# EAGLE board TSSOP28_Adapter (EAGLE 5.00)
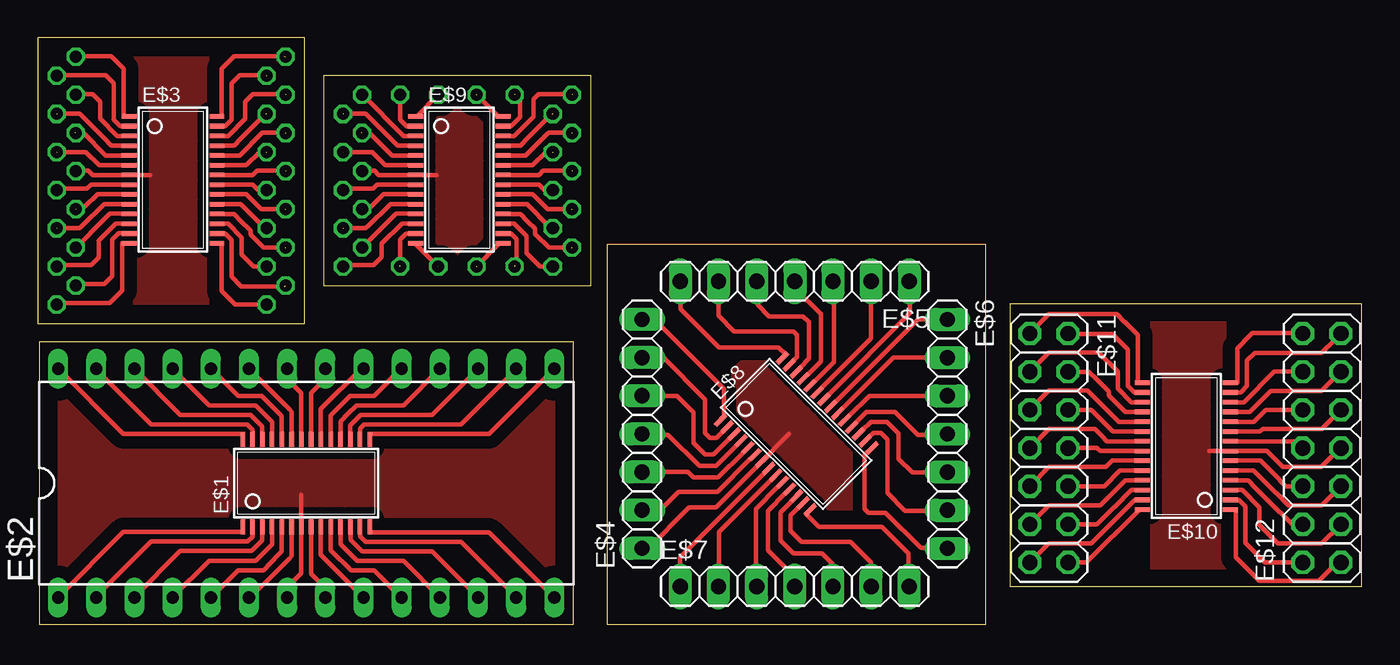
[diagram p0: board, top side]

Size 88.14 x 39.07 mm. Coordinates in mm from the lower left corner, seen from the top.
Outline: 35.66,18.8 0.1,18.8 0.1,0 35.66,0 35.66,18.8
Outline: 0,39.06 0,20.01 17.78,20.01 17.78,39.06 0,39.06
Outline: 37.9,25.3 37.9,0 63.12,0 63.12,25.3 37.9,25.3
Outline: 19.05,36.52 19.05,22.55 36.83,22.55 36.83,36.52 19.05,36.52
Outline: 88.14,2.51 88.14,21.31 64.72,21.31 64.72,2.51 88.14,2.51
Copper layers (1*16): Top 0.035mm / dielectric 1.5mm / Bottom 0.035mm
Design rules "default": minimum track width 10mil, minimum drill 24mil, track to track 8mil, track to pad 8mil, pad to pad 8mil, via to via 8mil, smd to smd 8mil, copper to edge 40mil, drill to drill 8mil, minimum pad ring 10mil, minimum via ring 8mil, stop-mask expansion 4mil, vias tented up to drill 0mil, thermal gap 10mil

## Footprints (pad centres in the part's own frame; a part is rotated, then mirrored left to right if it is on the bottom)
TSSOP28 = smd 0.305 x 0.991: 1 -4.225,-2.918; 2 -3.575,-2.918; 3 -2.925,-2.918; 4 -2.275,-2.918; 5 -1.625,-2.918; 6 -0.975,-2.918; 7 -0.325,-2.918; 8 0.325,-2.918; 9 0.975,-2.918; 10 1.625,-2.918; 11 2.275,-2.918; 12 2.925,-2.918; 13 3.575,-2.918; 14 4.225,-2.918; 15 4.225,2.918; 16 3.575,2.918; 17 2.925,2.918; 18 2.275,2.918; 19 1.625,2.918; 20 0.975,2.918; 21 0.325,2.918; 22 -0.325,2.918; 23 -0.975,2.918; 24 -1.625,2.918; 25 -2.275,2.918; 26 -2.925,2.918; 27 -3.575,2.918; 28 -4.225,2.918
DIL28 = drill 0.813 long: 1 -16.51,-7.62; 2 -13.97,-7.62; 3 -11.43,-7.62; 4 -8.89,-7.62; 5 -6.35,-7.62; 6 -3.81,-7.62; 7 -1.27,-7.62; 8 1.27,-7.62; 9 3.81,-7.62; 10 6.35,-7.62; 11 8.89,-7.62; 12 11.43,-7.62; 13 13.97,-7.62; 14 16.51,-7.62; 15 16.51,7.62; 16 13.97,7.62; 17 11.43,7.62; 18 8.89,7.62; 19 6.35,7.62; 20 3.81,7.62; 21 1.27,7.62; 22 -1.27,7.62; 23 -3.81,7.62; 24 -6.35,7.62; 25 -8.89,7.62; 26 -11.43,7.62; 27 -13.97,7.62; 28 -16.51,7.62
1X07 = drill 1.016 long: 1 -7.62,0; 2 -5.08,0; 3 -2.54,0; 4 0,0; 5 2.54,0; 6 5.08,0; 7 7.62,0
2X07 = drill 1.016 octagon: 1 -7.62,-1.27; 2 -7.62,1.27; 3 -5.08,-1.27; 4 -5.08,1.27; 5 -2.54,-1.27; 6 -2.54,1.27; 7 0,-1.27; 8 0,1.27; 9 2.54,-1.27; 10 2.54,1.27; 11 5.08,-1.27; 12 5.08,1.27; 13 7.62,-1.27; 14 7.62,1.27

## Placement (x,y rotation side)
E$1  [TSSOP28]  17.88,9.4 0 top
E$2  [DIL28]  17.88,9.4 0 top
E$3  [TSSOP28]  9.02,29.59 270 top
E$4  [1X07]  40.23,12.67 90 top
E$5  [1X07]  50.39,22.83 180 top
E$6  [1X07]  60.55,12.67 270 top
E$7  [1X07]  50.39,2.51 0 top
E$8  [TSSOP28]  50.5,12.67 315 top
E$9  [TSSOP28]  28.07,29.59 270 top
E$10  [TSSOP28]  76.45,11.86 90 top
E$11  [2X07]  67.31,11.73 270 top
E$12  [2X07]  85.47,11.73 90 top

## Library data of the parts
E$1 E$3 E$8-E$10 = ref-packages
E$2 = micro-motorola
E$4-E$7 E$11 E$12 = pinhead

## Nets
S$69: E$6.3
S$70: E$6.2
S$189: E$11.13
S$224: E$11.12
S$225: E$11.14

## Tracks (layer width: path | path; a pad name or v marks a point on that pad's centre or on a via)
GNDMC
  Top 0.305: 17.55,5.84 17.55,3.4 16.61,2.46 16.61,1.8 | 17.55,5.84 17.55,6.1 | 17.55,5.84 17.55,8.61
  pour Top (isolate 0.813): 34.42,3.53 1.37,3.53 1.37,15.14 34.42,15.14
S$1  (via drill 0.8)  (1 unrouted)
  Top 0.305: 25.2,25.35 25.2,25.27 26.64,23.82
  other vias: 26.67,23.83
S$2
  Top 0.305: 16.92,6.07 16.92,4.55 16.76,4.39 15.93,3.53 14.1,1.73
S$3
  Top 0.305: 16.26,6.15 16.26,4.85 16.05,4.65 15.52,4.09 15.04,3.61 13.36,3.61 11.56,1.8
S$4
  Top 0.305: 15.6,6.12 15.6,5.31 14.53,4.24 11.4,4.24 8.97,1.8
S$5
  Top 0.305: 14.93,6.1 14.93,5.59 14.25,4.88 9.5,4.88 6.43,1.8
S$6
  Top 0.305: 14.3,6.1 14.3,5.82 13.97,5.51 7.57,5.51 3.91,1.85
S$7
  Top 0.305: 13.66,6.15 5.71,6.15 1.4,1.83
S$8
  Top 0.305: 18.21,12.73 18.21,15.42 19.15,16.36 19.15,16.94
S$9
  Top 0.305: 18.85,12.75 18.85,14.33 21.54,16.99 21.67,16.99
S$10
  Top 0.305: 19.51,12.67 19.51,13.92 20.8,15.21 22.4,15.21 24.21,17.02
S$11
  Top 0.305: 20.17,12.7 20.17,13.51 20.65,14.02 21.23,14.58 24.36,14.58 26.8,17.02
S$12
  Top 0.305: 20.8,12.73 20.8,13.23 21.51,13.94 26.26,13.94 29.34,17.02
S$13
  Top 0.305: 21.46,12.8 21.46,13.03 21.74,13.31 28.19,13.31 31.85,16.97
S$14
  Top 0.305: 22.1,12.67 30.05,12.67 34.37,16.99
S$15
  Top 0.305: 18.21,6.07 18.21,3.38 19.15,2.44
S$16
  Top 0.305: 18.85,6.04 18.85,4.62 21.67,1.8
S$17
  Top 0.305: 24.21,1.78 22.4,3.58 20.85,3.58 19.51,4.93 19.51,6.12
S$18
  Top 0.305: 26.8,1.78 24.36,4.22 21.26,4.22 20.17,5.31 20.17,6.1
S$19
  Top 0.305: 20.83,6.07 20.83,5.61 21.59,4.85 26.26,4.85 29.34,1.78
S$20
  Top 0.305: 21.46,6.07 21.46,5.84 21.82,5.49 28.19,5.49 31.85,1.83
S$21
  Top 0.305: 22.1,6.12 30.05,6.12 34.37,1.8
S$22
  Top 0.305: 17.55,12.73 17.55,15.42 16.61,16.36
S$23
  Top 0.305: 16.92,12.75 16.92,14.15 16.76,14.3 15.87,15.21 14.1,16.99
S$24
  Top 0.305: 16.26,12.67 16.26,13.87 14.91,15.21 13.36,15.21 11.56,17.02
S$25
  Top 0.305: 15.6,12.7 15.6,13.46 15.11,13.97 14.5,14.58 11.4,14.58 8.97,17.02
S$26
  Top 0.305: 14.93,12.73 14.93,13.18 14.17,13.94 9.5,13.94 6.43,17.02
S$27
  Top 0.305: 14.3,12.73 14.3,12.95 13.94,13.31 7.57,13.31 3.91,16.97
S$28
  Top 0.305: 13.66,12.67 5.71,12.67 1.4,16.99
S$29
  Top 0.305: 19.13,1.83 19.13,2.41
S$30
  Top 0.305: 16.59,16.97 16.59,16.38
S$31  (via drill 0.8)
  other vias: 1.27,21.29
S$32  (via drill 0.8)
  other vias: 2.54,22.56
S$33  (via drill 0.8)
  other vias: 1.27,23.83
S$34  (via drill 0.8)
  other vias: 2.54,25.1
S$35  (via drill 0.8)  (1 unrouted)
  Top 0.305: 2.9,26.47 2.79,26.36 1.32,26.36
  other vias: 1.27,26.37
S$36  (via drill 0.8)  (1 unrouted)
  Top 0.305: 3.07,27.76 2.97,27.66 2.57,27.66
  other vias: 2.54,27.64
S$37  (via drill 0.8)
  other vias: 1.27,28.91
S$38
  Top 0.305: 4.42,32.36 2.79,33.98
S$39  (via drill 0.8)  (1 unrouted)
  Top 0.305: 13.56,32.36 15.19,33.98
  other vias: 15.24,33.99
S$40
  Top 0: 7.47,29.92 7.21,29.92 | 7.49,29.92 7.62,29.92
  Top 0.305: 5.64,29.92 5.66,29.92 | 2.51,30.2 3.38,30.2 3.66,29.92 5.64,29.92 | 5.64,29.92 7.47,29.92 7.49,29.92
  pour Top (isolate 0.813): 6.35,37.8 11.43,37.8 11.43,21.29 6.35,21.29
S$41  (via drill 0.8)  (1 unrouted)
  Top 0.305: 24.76,26.01 24.54,26.01 24.13,25.6 24.13,23.88
  other vias: 24.13,23.83
S$42  (via drill 0.8)  (1 unrouted)
  Top 0.305: 14.81,27.71 14.88,27.63 16.48,27.63
  other vias: 16.51,27.64
S$43
  Top 0.305: 5.64,30.56 4.09,30.56 3.2,31.44
S$44  (via drill 0.8)
  other vias: 1.27,36.53
S$45  (via drill 0.8)  (1 unrouted)
  Top 0.305: 1.32,33.98 2.74,33.98
  other vias: 1.27,33.99
S$46  (via drill 0.8)  (1 unrouted)
  Top 0.305: 1.3,31.44 3.17,31.44
  other vias: 1.27,31.45
S$47  (via drill 0.8)  (1 unrouted)
  Top 0.305: 15.24,22.5 16.46,22.5
  other vias: 16.51,22.56
S$48
  Top 0.305: 5.64,31.22 4.55,31.22 3.02,32.74
S$49
  Top 0.305: 45.69,13.92 45.69,15.67 41.07,20.29 40.31,20.29 40.28,20.32
S$50
  Top 0.305: 40.23,17.75 40.21,17.78
S$51
  Top 0.305: 45.62,12.85 45.19,12.42 44.75,12.42 44.42,12.75 44.42,14.99 41.58,17.83 40.49,17.83 40.39,17.73
S$52
  Top 0.305: 42.77,2.54 42.75,2.57 42.75,4.47 48.36,10.08
S$53
  Top 0.305: 46.08,12.39 44.98,11.33 44.42,11.33 43.66,12.09 43.66,14.1 42.57,15.21 40.33,15.21
S$54
  Top 0.305: 46.51,11.91 45.14,10.54 44.04,10.54 41.96,12.62 40.18,12.62
S$55
  Top 0.305: 46.96,11.46 45.29,9.78 43.64,9.78 43.28,10.13 40.31,10.13
S$56
  Top 0.305: 47.42,11 45.24,8.81 42.65,8.81 41.38,7.54 40.28,7.54
S$57
  Top 0.305: 47.85,10.49 45.14,7.77 43.36,7.77 40.59,5 40.28,5 | 47.85,10.49 47.93,10.57 | 47.85,10.49 47.93,10.59 50.01,12.67
  pour Top (isolate 0.61): 46.33,16.87 46.33,14.02 52.63,7.72 54.31,7.72 54.41,7.82 54.41,11.63 53.75,12.29 48.62,17.42 46.86,17.42 46.38,16.94
S$58
  Top 0.305: 47.85,2.59 47.88,2.62
S$59
  Top 0.305: 48.84,9.65 45.36,6.17 45.36,2.51
S$60
  Top 0.305: 49.28,9.17 47.8,7.67 47.8,2.57
S$61
  Top 0.305: 49.76,8.74 48.62,7.57 48.62,4.93 50.27,3.28 50.39,3.28 50.34,3.23 50.34,2.54
S$62
  Top 0.305: 50.19,8.23 49.43,7.47 49.43,5.59 50.29,4.72 52.2,4.72 52.93,3.99 52.93,2.62
S$63
  Top 0.305: 50.65,7.77 50.11,7.24 50.11,6.22 50.85,5.49 54.1,5.49 55.47,4.11 55.47,2.62
S$64
  Top 0.305: 51.13,7.34 51.99,6.5 56.18,6.5 57.96,4.72 57.96,2.64
S$65
  Top 0.305: 55.27,11.51 55.04,11.28 55.04,7.67 55.3,7.42 56.44,7.42 58.78,5.08 60.58,5.08
S$66
  Top 0.305: 55.37,12.5 55.63,12.75 56.13,12.75 56.57,12.32 56.57,8.74 57.73,7.57 60.63,7.57
S$67
  Top 0.305: 54.89,12.93 55.45,13.49 56.54,13.49 57.3,12.73 57.3,11.02 58.22,10.11 60.68,10.11
S$68
  Top 0.305: 54.41,13.39 55.17,14.15 57.05,14.15 58.57,12.62 59.66,12.62 59.72,12.67 60.58,12.67 60.55,12.7 60.55,12.73
S$69
  Top 0.305: 54,13.87 55.35,15.21 E$6.3
S$70
  Top 0.305: 53.54,14.35 56.95,17.75 E$6.2
S$71
  Top 0.305: 53.06,14.78 58.57,20.29 60.63,20.29
S$72
  Top 0.305: 52.6,15.24 58.06,20.73 58.06,22.86
S$73
  Top 0.305: 52.15,15.7 55.47,19.02 55.47,22.86
S$74
  Top 0.305: 51.69,16.18 52.98,17.47 52.98,22.78
S$75
  Top 0.305: 51.23,16.61 52.12,17.5 52.12,20.65 50.44,22.33 50.44,22.86
S$76
  Top 0.305: 50.75,17.07 51.33,17.7 51.33,20.12 50.95,20.5 48.69,20.5 47.93,21.26 47.93,22.81
S$77
  Top 0.305: 50.34,17.6 50.55,17.81 50.55,19.25 50.32,19.51 46.35,19.51 45.31,20.55 45.31,22.81
S$78
  Top 0.305: 49.76,17.98 49.3,18.44 45.36,18.44 42.8,21.01 42.8,22.86
S$79
  Top 0.305: 5.64,31.88 4.9,31.88 4.42,32.36
S$80
  Top 0.305: 5.69,32.51 5.31,32.51 4.17,33.65 4.17,34.8 3.68,35.28 2.54,35.28
S$81  (via drill 0.8)
  other vias: 2.54,37.8
S$82  (via drill 0.8)
  other vias: 2.54,35.26
S$83  (via drill 0.8)  (1 unrouted)
  Top 0.305: 2.97,32.74 2.51,32.74
  other vias: 2.54,32.72
S$84  (via drill 0.8)
  other vias: 2.54,30.18
S$85  (via drill 0.8)
  other vias: 15.24,21.29
S$86  (via drill 0.8)
  other vias: 15.24,23.83
S$87  (via drill 0.8)
  other vias: 15.24,26.37
S$88  (via drill 0.8)
  other vias: 15.24,28.91
S$89  (via drill 0.8)  (1 unrouted)
  Top 0.305: 12.32,29.92 14.33,29.92 14.6,30.2 16.51,30.2
  other vias: 16.51,30.18
S$90  (via drill 0.8)  (1 unrouted)
  Top 0.305: 12.34,30.56 13.89,30.56 14.78,31.44 15.21,31.44
  other vias: 15.24,31.45
S$91  (via drill 0.8)  (1 unrouted)
  Top 0.305: 12.34,31.22 13.44,31.22 14.96,32.74 16.48,32.74
  other vias: 16.51,32.72
S$92
  Top 0.305: 12.34,31.88 13.08,31.88 13.56,32.36
S$93  (via drill 0.8)  (1 unrouted)
  Top 0.305: 12.29,32.51 12.67,32.51 13.82,33.65 13.82,34.8 14.3,35.28 16.51,35.28
  other vias: 16.51,35.26
S$94  (via drill 0.8)  (1 unrouted)
  Top 0.305: 12.34,33.17 12.47,33.17 12.9,33.6 12.9,36.02 13.44,36.55 15.21,36.55
  other vias: 15.24,36.53
S$95  (via drill 0.8)  (1 unrouted)
  Top 0.305: 12.24,33.83 12.24,36.98 13.08,37.82 16.41,37.82
  other vias: 16.51,37.8
S$96
  Top 0.305: 2.69,25.22 4.32,26.85
S$97
  Top 0.305: 5.56,29.29 3.56,29.29 3.28,29.01 1.37,29.01
S$98
  Top 0.305: 5.54,28.65 3.99,28.65 3.1,27.76
S$99
  Top 0.305: 5.54,27.99 4.44,27.99 2.92,26.47
S$100
  Top 0.305: 5.54,27.33 4.8,27.33 4.32,26.85
S$101
  Top 0.305: 5.59,26.7 5.21,26.7 4.06,25.55 4.06,24.41 3.58,23.93 1.37,23.93
S$102
  Top 0.305: 5.54,26.03 5.41,26.03 4.98,25.6 4.98,23.19 4.44,22.66 2.72,22.66
S$103
  Top 0.305: 5.64,25.37 5.64,22.22 4.8,21.39 1.52,21.39
S$104
  Top 0.305: 14.15,26.24 13.56,26.82
S$105
  Top 0.305: 12.32,29.26 14.33,29.26 14.68,28.9 15.29,28.9
S$106
  Top 0.305: 12.34,28.63 13.89,28.63 14.78,27.74
S$107
  Top 0.305: 12.34,27.97 13.51,27.97 15.04,26.44
S$108
  Top 0.305: 12.34,27.3 13.08,27.3 13.56,26.82
S$109
  Top 0.305: 12.29,26.67 12.67,26.67 13.59,25.76 13.59,24.61 14.38,23.82 15.24,23.82
S$110
  Top 0.305: 12.34,26.01 12.47,26.01 12.9,25.58 12.9,23.16 13.56,22.5 15.29,22.5
S$111
  Top 0.305: 12.24,25.35 12.24,22.2 13.16,21.28 15.24,21.28
S$112
  Top 0.305: 5.64,33.17 5.51,33.17 5.08,33.6 5.08,36.02 4.55,36.55 1.32,36.55
S$113
  Top 0.305: 5.74,33.83 5.74,36.98 4.9,37.82 2.54,37.82
S$114  (via drill 0.8)  (1 unrouted)
  Top 0.305: 14.17,26.21 14.17,25.96 15.04,25.09 16.48,25.09 16.48,25.07
  other vias: 16.51,25.1
S$115  (via drill 0.8)
  other vias: 20.32,23.83
S$116  (via drill 0.8)
  other vias: 21.59,25.1
S$117  (via drill 0.8)  (1 unrouted)
  Top 0.305: 21.95,26.47 21.84,26.36 20.37,26.36
  other vias: 20.32,26.37
S$118  (via drill 0.8)  (1 unrouted)
  Top 0.305: 22.12,27.76 22.02,27.66 21.62,27.66
  other vias: 21.59,27.64
S$119  (via drill 0.8)
  other vias: 20.32,28.91
S$120  (via drill 0.8)  (1 unrouted)
  Top 0.305: 32.61,32.36 34.24,33.98
  other vias: 34.29,33.99
S$121  (via drill 0.8)  (1 unrouted)
  Top 0.305: 33.86,27.71 33.93,27.63 35.53,27.63
  other vias: 35.56,27.64
S$122
  Top 0.305: 82.5,12.19 83.74,12.19 84.18,11.76
S$123  (via drill 0.8)  (1 unrouted)
  Top 0.305: 20.37,33.98 21.79,33.98
  other vias: 20.32,33.99
S$124  (via drill 0.8)  (1 unrouted)
  Top 0.305: 20.35,31.44 22.22,31.44
  other vias: 20.32,31.45
S$126  (via drill 0.8)
  Top 0.305: 25.22,33.81 v26.67,35.25
S$127  (via drill 0.8)
  other vias: 21.59,35.26
S$128  (via drill 0.8)  (1 unrouted)
  Top 0.305: 22.02,32.74 21.56,32.74
  other vias: 21.59,32.72
S$129  (via drill 0.8)
  other vias: 21.59,30.18
S$130  (via drill 0.8)  (1 unrouted)
  Top 0.305: 30.66,25.35 30.66,25.27 29.24,23.85
  other vias: 29.21,23.83
S$131  (via drill 0.8)
  other vias: 34.29,23.83
S$132  (via drill 0.8)
  other vias: 34.29,26.37
S$133  (via drill 0.8)
  other vias: 34.29,28.91
S$134  (via drill 0.8)  (1 unrouted)
  Top 0.305: 31.37,29.92 33.38,29.92 33.65,30.2 35.56,30.2
  other vias: 35.56,30.18
S$135  (via drill 0.8)  (1 unrouted)
  Top 0.305: 31.39,30.56 32.94,30.56 33.83,31.44 34.26,31.44
  other vias: 34.29,31.45
S$136  (via drill 0.8)  (1 unrouted)
  Top 0.305: 31.39,31.22 32.49,31.22 34.01,32.74 35.53,32.74
  other vias: 35.56,32.72
S$137
  Top 0.305: 31.39,31.88 32.13,31.88 32.61,32.36
S$138  (via drill 0.8)  (1 unrouted)
  Top 0.305: 31.34,32.51 31.72,32.51 32.99,33.81 32.99,34.95 33.35,35.28 35.56,35.28
  other vias: 35.56,35.26
S$140  (via drill 0.8)  (1 unrouted)
  Top 0.305: 30.91,33.83 30.63,33.83 29.24,35.23
  other vias: 29.21,35.26
S$141
  Top 0.305: 21.74,25.22 23.37,26.85
S$142
  Top 0.305: 24.61,29.29 22.61,29.29 22.33,29.01 20.42,29.01
S$143
  Top 0.305: 24.59,28.65 23.04,28.65 22.15,27.76
S$144
  Top 0.305: 24.59,27.99 23.49,27.99 21.97,26.47
S$145
  Top 0.305: 24.59,27.33 23.85,27.33 23.37,26.85
S$146
  Top 0.305: 24.64,26.7 24.26,26.7 22.91,25.35 22.91,24.46 22.38,23.93 20.42,23.93
S$147  (via drill 0.8)  (1 unrouted)
  Top 0.305: 31.34,33.17 31.52,33.17 32.11,33.76 32.11,34.92 31.78,35.25
  other vias: 31.75,35.26
S$148  (via drill 0.8)
  Top 0.305: 24.69,33.15 24.59,33.15 24.13,33.6 v24.13,35.25
S$149
  Top 0.305: 32.61,26.82 33.1,26.34
S$150
  Top 0.305: 31.37,29.26 33.38,29.26 33.73,28.9 34.34,28.9
S$151
  Top 0.305: 31.39,28.63 32.94,28.63 33.83,27.74
S$152
  Top 0.305: 31.39,27.97 32.56,27.97 34.09,26.44
S$153
  Top 0.305: 31.39,27.3 32.13,27.3 32.61,26.82
S$154
  Top 0.305: 31.42,26.67 31.72,26.67 32.54,25.86 32.54,24.71 33.43,23.82 34.29,23.82
S$155  (via drill 0.8)  (1 unrouted)
  Top 0.305: 31.34,26.01 31.52,26.01 31.88,25.65 31.88,24 31.75,23.88
  other vias: 31.75,23.83
S$157
  Top 0.305: 23.47,32.36 21.84,33.98
S$158
  Top 0: 26.52,29.92 26.26,29.92 | 26.54,29.92 26.67,29.92
  Top 0.305: 24.69,29.92 24.71,29.92 | 21.56,30.2 22.43,30.2 22.71,29.92 24.69,29.92 | 24.69,29.92 26.52,29.92 26.54,29.92
  pour Top (isolate 0.813): 19.58,36.14 36.55,36.14 36.55,22.86 19.58,22.86
S$159
  Top 0.305: 24.69,30.56 23.14,30.56 22.25,31.44
S$160
  Top 0.305: 24.69,31.22 23.6,31.22 22.07,32.74
S$161
  Top 0.305: 24.69,31.88 23.95,31.88 23.47,32.36
S$162
  Top 0.305: 24.74,32.51 24.36,32.51 21.59,35.28
S$165  (via drill 0.8)  (1 unrouted)
  Top 0.305: 33.1,26.31 33.1,25.98 34.04,25.07 35.53,25.09 35.53,25.07
  other vias: 35.56,25.1
S$166
  Top 0.305: 81.74,14.27 84.18,14.27
S$167
  Top 0.305: 81.36,12.83 81.53,13 85.47,13 86.69,14.22 86.69,14.25
S$168
  Top 0.305: 82.09,11.25 82.85,10.49 85.45,10.49 86.66,11.71 86.72,11.71
S$170
  Top 0.305: 70.59,13.82 70.66,13.74
S$171
  Top 0.305: 82.24,10.03 83.08,9.19 84.23,9.19
S$173
  Top 0.305: 82.42,8.74 83.24,7.92 85.47,7.92 86.72,9.17 86.74,9.17
S$175
  Top 0.305: 82.7,7.44 83.49,6.65 84.15,6.65
S$176
  Top 0.305: 81.76,6.17 82.55,5.38 85.47,5.38 86.72,6.63 86.72,6.68
S$177
  Top 0.305: 80.92,4.88 81.66,4.14 84.15,4.14
S$178
  Top 0.305: 81.13,14.6 82.07,15.54 85.45,15.54 86.69,16.79
S$183
  Top 0.305: 71.15,11.53 73.15,11.53
S$184
  Top 0.305: 71.53,10.9 73.13,10.9
S$185
  Top 0.305: 73.13,10.24 72.03,10.24 70.99,9.19 68.61,9.19
S$186
  Top 0.305: 73.13,9.58 72.39,9.58 70.74,7.92 67.31,7.92 66.07,6.68
S$187
  Top 0.305: 73.18,8.94 72.8,8.94 71.65,7.8
S$188
  Top 0.305: 73.13,8.28 73.02,8.28 72.59,7.85
S$189
  Top 0.305: 72.59,7.85 70.13,5.38 67.31,5.38 E$11.13
S$190
  Top 0.305: 82.32,16.84 84.2,16.84
S$191
  Top 0.305: 79.83,12.19 82.52,12.19
S$192
  Top 0.305: 79.81,12.83 81.36,12.83
S$193
  Top 0.305: 79.86,13.49 80.95,13.49 81.74,14.27
S$194
  Top 0.305: 79.81,14.15 80.67,14.15 81.13,14.6
S$195
  Top 0.305: 79.88,14.78 80.26,14.78 82.32,16.84
S$196
  Top 0.305: 79.88,15.44 80.06,15.44 80.49,15.87 80.49,17.55 81,18.06 | 81,18.06 81.03,18.06 | 81,18.06 85.45,18.06 86.28,18.9 86.77,19.33
S$197
  Top 0.305: 79.83,16.08 79.83,18.36 80.72,19.25
S$198
  Top 0.305: 71.32,15.21 71.91,14.63
S$199
  Top 0.305: 73.15,12.19 71.17,12.19 70.81,12.55
S$200
  Top 0.305: 73.13,12.83 71.58,12.83 70.69,13.72
S$201
  Top 0.305: 73.13,13.49 71.96,13.49 70.43,15.01
S$202
  Top 0.305: 73.13,14.15 72.39,14.15 71.91,14.63
S$203
  Top 0.305: 73.18,14.78 72.8,14.78 71.88,15.7 71.88,16.84 70.61,18.11 67.31,18.11 66.07,16.87 66.04,16.87
S$204
  Top 0.305: 73.13,15.44 73,15.44 72.57,15.87 72.57,18.29 71.53,19.33 68.58,19.33
S$205
  Top 0.305: 73.23,16.1 73.23,19.25 72.31,20.17
S$206
  Top 0.305: 81.05,9.09 82.68,7.47
S$207
  Top 0: 78,11.53 78.26,11.53 | 77.98,11.53 77.85,11.53
  Top 0.305: 79.83,11.53 79.81,11.53 | 82.09,11.25 81.81,11.53 79.83,11.53 | 79.83,11.53 78,11.53 77.98,11.53
  pour Top (isolate 0.813): 79.12,3.66 74.04,3.66 74.04,20.17 79.12,20.17
S$208
  Top 0.305: 79.83,10.9 81.38,10.9 82.27,10.01
S$209
  Top 0.305: 79.83,10.24 80.92,10.24 82.45,8.71
S$210
  Top 0.305: 79.83,9.58 80.57,9.58 81.05,9.09
S$211
  Top 0.305: 79.78,8.94 80.16,8.94 81.31,7.8 81.31,6.63 81.79,6.15
S$212
  Top 0.305: 79.83,8.28 79.96,8.28 80.39,7.85 80.39,5.41 80.92,4.88
S$213
  Top 0.305: 79.73,7.62 79.73,4.47 81.31,2.9 85.27,2.9 86.54,4.17 86.69,4.17 | 86.69,4.17 86.77,4.17 | 86.69,4.17 86.74,4.17
S$214
  Top 0.305: 71.3,15.24 71.3,15.49 70.43,16.36
S$216
  Top 0.305: 80.62,19.15 80.85,19.38 84.1,19.38
S$217
  Top 0.305: 72.34,20.14 71.83,20.65 67.31,20.65 66.04,19.38
S$218
  Top 0.305: 70.46,16.33 69.98,16.81 68.61,16.81
S$219
  Top 0.305: 70.41,15.04 69.88,15.57 67.31,15.57 66.07,14.33
S$220
  Top 0.305: 70.61,13.79 70.13,14.27 68.61,14.27
S$221
  Top 0.305: 70.79,12.57 70.36,13 67.31,13 66.07,11.76
S$222
  Top 0.305: 71.12,11.53 70.71,11.53 70.51,11.73 68.61,11.73
S$223
  Top 0.305: 71.53,10.9 71.09,10.46 67.31,10.46 66.09,9.25 66.09,9.22
S$224
  Top 0.305: 71.63,7.77 70.51,6.65 E$11.12
S$225
  Top 0.305: 73.28,7.59 69.8,4.11 E$11.14